# Altium PCB PCB_mezzanine_analog_template.PcbDoc (part 2 of 2)
Units mm, origin at the board's own origin, x right, y up, seen from the top; angles counter-clockwise.
Board outline 100.05 x 34.55 mm, 4 copper layers (Component Side, Ground Plane, Power Plane, Solder Side), stack 1.013 mm thick; 137 components, 101 nets, 470 pads, 426 vias.
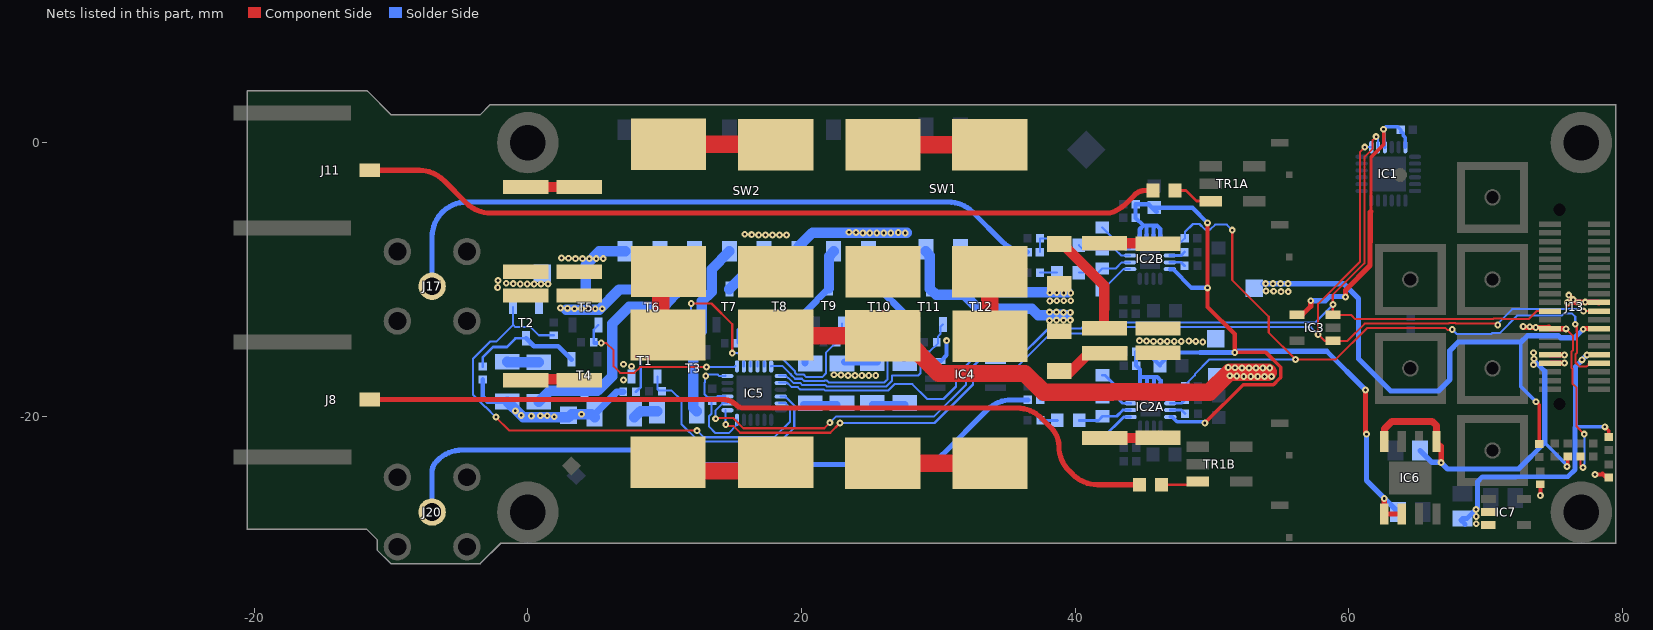
[diagram p4: the nets of this part, all layers, seen from the top]

## Via types
v1: diameter 0.5, hole 0.2, Component Side to Solder Side, tented both sides, 307 vias
v2: diameter 0.6, hole 0.3, Component Side to Solder Side, tented both sides, 114 vias
v3: diameter 0.5, hole 0.2, Component Side to Solder Side, 5 vias

## Nets (pads, with @x,y where several pads share a name; then routed paths per layer and width w, separated by ;. In a path a pad name is that pad's centre, name@x,y a point inside that pad or via, vN(x,y) a via of type N, cw(c..) or ccw(c..) an arc to the next point about the centre after c; other vN are vias at no path point) (continued)
N6V0A: C26.2 IC7.2 IC7.3 J13.31 R7.2 R36.1 R38.1 R46.2 R47.2 TP4.1 | length 36
  Component Side w0.254: v1(78.713,-20.772) 79,-21.059 R7.2@79,-21.53
  Solder Side w0.254: 76.579,-20.772 v1(78.713,-20.772)
  Solder Side w0.356: R47.2@-3.304,-17.305 -3.304,-18.562 -2.946,-18.92 R38.1@-1.501,-18.92 ; C26.2@68.181,-27.581 C26.2@68.5,-27.9 ; C26.2@68.299,-27.463 68.643,-27.463 v1(69.289,-26.817) 69.416,-26.69 69.416,-24.769 69.756,-24.43 72.2,-24.43 72.21,-24.42 76.012,-24.42 76.532,-23.9 76.532,-20.819 76.579,-20.772 76.579,-16.36 77.051,-15.888 v1(77.051,-15.875) ; v1@77.076,-15.849 v1(77.406,-15.519)
  Solder Side w0.508: R36.1@4.873,-19.858 6.524,-18.207 R46.2@6.97,-18.207
  Solder Side w0.762: R38.1@-1.501,-18.92 v1(-0.487,-19.934) -0.334,-20.086 2.97,-20.086 3.198,-19.858 v1(3.91,-19.858) 4.644,-19.858 R36.1@4.873,-20.086
  other v1: 69.315,-27.859 69.315,-27.325 1.928,-20.035 0.252,-19.985 0.912,-19.959 1.42,-19.959 -0.916,-19.604
N12V0A: J13.25 R8.2 R24.1 R26.1 TP2.1 | length 44.1
  Component Side w0.254: v1(73.683,-18.943) 73.912,-19.172 R8.2@73.912,-22.029
  Component Side w0.381: v1(77.138,-13.635) 77.185,-13.587 J13.25@78.3,-13.587
  Solder Side w0.254: 72.566,-14.574 72.566,-17.826 v1(73.683,-18.943)
  Solder Side w0.381: v1@53.719,-10.307 v1(53.922,-10.307) v1(54.456,-10.307) v1(55.014,-10.307) v1(55.548,-10.307) 59.622,-10.307 60.704,-11.39 60.704,-15.794 63.066,-18.156 66.546,-18.156 67.384,-17.318 67.384,-15.184 67.994,-14.574 72.566,-14.574 72.591,-14.574 73.057,-14.108 75.326,-14.108 75.482,-14.265 76.508,-14.265 v1(77.138,-13.635)
  Solder Side w0.508: R26.1@23.125,-16.046 R24.1@25.538,-16.046
  other v1: 23.391,-17.013 23.899,-17.013 24.407,-17.013 24.915,-17.013 25.423,-17.013 22.883,-16.987 22.375,-16.962 55.04,-10.891 55.573,-10.891 54.506,-10.866 53.948,-10.841
NetC5A_1: C5A.1 R10A.1 R13A.2 | length 2.4
  Solder Side w0.203: C5A.1@37.45,-18.8 37.47,-18.78 R13A.2@37.47,-17.8 38.2,-17.8 R10A.1@38.7,-18.3
NetC5B_1: C5B.1 R10B.1 R13B.2 | length 2.4
  Solder Side w0.152: C5B.1@37.42,-8 37.44,-7.98 R13B.2@37.44,-7 38.17,-7 R10B.1@38.67,-7.5
NetC13A_2: C13A.2 TR1A.1 | length 2.9
  Component Side w0.203: C13A.2@47.3,-3.5 48.106,-3.5 48.876,-4.27 TR1A.1@49.91,-4.27
NetC13B_2: C13B.2 TR1B.1 | length 2.8
  Component Side w0.203: C13B.2@46.3,-25 48.73,-25 TR1B.1@48.96,-24.77
NetIC2A_1: IC2A.1 R15A.2 | length 2.7
  Solder Side w0.203: R15A.2@42,-21.6 43.55,-20.05 IC2A.1@44.05,-20.05
NetIC2A_2: IC2A.2 R12A.2 R15A.1 | length 4.1
  Solder Side w0.203: R12A.2@40.3,-20.3 41.7,-20.3 R15A.1@42,-20 43.036,-20 43.486,-19.55 IC2A.2@44.05,-19.55
NetIC2A_3: IC2A.3 R9A.1 R10A.2 | length 4.1
  Solder Side w0.203: R10A.2@40.3,-18.3 41.7,-18.3 R9A.1@42,-18.6 43.013,-18.6 43.463,-19.05 IC2A.3@44.05,-19.05
NetIC2A_4: IC2A.4 R9A.2 | length 2.7
  Solder Side w0.203: R9A.2@42,-17 42.175,-17 43.725,-18.55 IC2A.4@44.05,-18.55
NetIC2A_10: IC2A.10 R11A.2 | length 1.2
  Solder Side w0.203: IC2A.10@46.95,-19.05 47.78,-19.05 R11A.2@48.03,-18.8
NetIC2A_11: IC2A.11 R14A.2 | length 1.2
  Solder Side w0.203: IC2A.11@46.95,-19.55 47.78,-19.55 R14A.2@48.03,-19.8
NetIC2B_1: IC2B.1 R15B.2 | length 2.7
  Solder Side w0.152: R15B.2@41.97,-10.8 43.52,-9.25 IC2B.1@44.02,-9.25
NetIC2B_2: IC2B.2 R12B.2 R15B.1 | length 4.1
  Solder Side w0.152: R12B.2@40.27,-9.5 41.67,-9.5 R15B.1@41.97,-9.2 42.964,-9.2 43.414,-8.75 IC2B.2@44.02,-8.75
NetIC2B_3: IC2B.3 R9B.1 R10B.2 | length 4.1
  Solder Side w0.152: R10B.2@40.27,-7.5 40.57,-7.8 R9B.1@41.97,-7.8 42.906,-7.8 43.356,-8.25 IC2B.3@44.02,-8.25
NetIC2B_4: IC2B.4 R9B.2 | length 2.7
  Solder Side w0.152: R9B.2@41.97,-6.2 43.52,-7.75 IC2B.4@44.02,-7.75
NetIC2B_10: IC2B.10 R11B.2 | length 1.2
  Solder Side w0.203: IC2B.10@46.92,-8.25 47.75,-8.25 R11B.2@48,-8
NetIC2B_11: IC2B.11 R14B.2 | length 1.2
  Solder Side w0.203: IC2B.11@46.92,-8.75 47.75,-8.75 R14B.2@48,-9
NetR12A_1: R12A.1 R16A.2 | length 1.2
  Solder Side w0.203: R16A.2@37.47,-20.3 R12A.1@38.7,-20.3
NetR12B_1: R12B.1 R16B.2 | length 1.2
  Solder Side w0.152: R16B.2@37.44,-9.5 R12B.1@38.67,-9.5
NetR18_2: R18.2 R19.1 | length 3.9
  Component Side w0.762: R19.1@42.137,-7.36 46.023,-7.36 R18.2@46.048,-7.385
NetR19_2: R19.2 R20.1 | length 7.7
  Component Side w0.762: R20.1@38.835,-7.409 39.086,-7.409 42.137,-10.46 42.137,-12.146 42.107,-12.176 42.107,-13.53 R19.2@42.137,-13.56
NetR20_2: R20.2 SW1.1 T12.3 | length 9.8
  Solder Side w0.762: SW1.1@31.621,-7.95 33.145,-9.474 T12.3@33.145,-10.709 33.378,-10.942 v1@39.444,-10.942
  other v1: 38.149,-11.577 38.657,-11.552 39.165,-11.552 39.673,-11.552 39.165,-10.993 39.673,-10.993 38.149,-10.968 38.657,-10.968
NetR21_2: R21.2 R22.1 | length 3.9
  Component Side w0.762: R22.1@42.162,-21.587 46.023,-21.587 R21.2@46.048,-21.562
NetR22_2: R22.2 R23.1 | length 3.9
  Component Side w0.762: R23.1@38.86,-16.888 39.493,-16.888 40.994,-15.387 R22.2@42.162,-15.387
NetR23_2: R23.2 SW1.2 T11.3 | length 13.8
  Solder Side w0.762: SW1.2@29.081,-7.95 29.386,-8.255 T11.3@29.386,-10.684 29.833,-11.13 31.911,-11.13 32.916,-12.136 36.828,-12.136 37.311,-12.619 39.368,-12.619 ; v1@38.758,-12.593 38.962,-12.593
  other v1: 38.123,-13 38.631,-12.974 39.139,-12.974 39.647,-12.974 39.139,-12.415 39.647,-12.415 38.123,-12.39 38.631,-12.39
NetR24_2: R24.2 R25.1 | length 2.4
  Solder Side w0.508: R24.2@25.169,-19.149 R25.1@27.557,-19.149
NetR25_2: R25.2 SW2.1 T10.3 | length 8.9
  Solder Side w0.508: T10.3@25.703,-10.684 27.506,-12.487 R25.2@27.506,-15.766
  Solder Side w0.762: SW2.1@24.89,-7.95 25.703,-8.763 T10.3@25.703,-10.684
NetR26_2: R26.2 R27.1 | length 2.4
  Solder Side w0.508: R27.1@20.153,-19.148 R26.2@22.591,-19.148
NetR27_2: R27.2 SW2.2 T9.3 | length 9
  Solder Side w0.508: R27.2@20.242,-16.096 20.242,-12.407 T9.3@22.009,-10.64
  Solder Side w0.762: T9.3@22.009,-10.64 22.009,-8.291 SW2.2@22.35,-7.95
NetR28_2: R28.2 R29.1 | length 7.9
  Component Side w1.27: R28.2@25.931,-23.426 33.765,-23.426 R29.1@33.78,-23.441
NetR29_2: R29.2 R30.1 | length 4.7
  Component Side w1.27: R30.1@33.755,-9.445 33.755,-14.115 R29.2@33.78,-14.141
NetR30_2: R30.2 R31.1 | length 7.8
  Component Side w1.27: R31.1@25.957,-0.145 R30.2@33.755,-0.145
NetR31_2: R31.2 SW2.3 T8.3 | length 11.9
  Solder Side w0.762: T8.3@18.413,-10.658 19.81,-9.261 SW2.3@19.81,-7.95 19.81,-7.589 20.801,-6.599 v1(24.484,-6.599) v1(24.992,-6.599) v1(25.5,-6.599) v1(26.008,-6.599) v1(26.516,-6.599) v1(27.582,-6.599) v1@27.684,-6.599
  other v1: 23.976,-6.573 27.074,-6.573 23.468,-6.548
NetR32_2: R32.2 R33.1 | length 8.4
  Component Side w1.27: R33.1@10.234,-23.366 10.871,-24.003 17.47,-24.003 R32.2@18.108,-23.365
NetR33_2: R33.2 R34.1 | length 5.2
  Component Side w1.27: R33.2@10.234,-14.066 10.285,-14.016 10.285,-13.028 9.701,-12.444 9.701,-10.004 R34.1@10.285,-9.42
NetR34_2: R34.2 R35.1 | length 7.8
  Component Side w1.27: R34.2@10.285,-0.12 18.083,-0.12 R35.1@18.108,-0.145
NetR35_2: R35.2 SW2.4 T7.3 | length 3.8
  Solder Side w0.762: T7.3@14.73,-10.709 17.115,-8.324 ccw(c16.741,-7.95) SW2.4@17.27,-7.95
  other v1: 16.864,-6.751 17.372,-6.751 17.88,-6.751 18.388,-6.751 18.896,-6.751 16.356,-6.726 15.848,-6.7
NetR36_2: R36.2 R37.1 | length 1.9
  Solder Side w0.762: R36.2@7.773,-20.086 8.23,-19.629 R37.1@9.445,-19.629
NetR37_2: R37.2 SW2.5 T3.3 | length 12.9
  Solder Side w0.762: R37.2@12.345,-19.629 12.088,-19.373 T3.3@12.088,-17.629 12.088,-14.422 12.719,-13.791 12.719,-11.607 13.435,-10.891 13.435,-9.245 SW2.5@14.73,-7.95
NetR38_2: R38.2 R39.1 | length 2.3
  Solder Side w0.762: R38.2@-1.501,-16.02 -1.475,-16.045 R39.1@0.785,-16.045
NetR39_2: R39.2 SW2.6 T4.3 | length 19.3
  Solder Side w0.762: R39.2@0.785,-18.945 1.586,-18.144 T4.3@4.128,-18.144 5.088,-18.144 6.17,-17.062 6.17,-13.228 7.415,-11.984 9.929,-11.984 10.492,-11.421 10.492,-11.38 11.027,-10.845 11.068,-10.845 12.19,-9.723 SW2.6@12.19,-7.95
NetR40_2: R40.2 R41.1 | length 4
  Component Side w0.762: R40.2@-0.104,-17.292 3.705,-17.292 R41.1@3.808,-17.395
NetR41_2: R41.2 SW2.7 T6.3 | length 9.9
  Solder Side w0.762: v1@2.789,-12.214 4.418,-12.214 5.203,-12.214 6.683,-10.734 T6.3@9.091,-10.734 9.65,-10.176 SW2.7@9.65,-7.95
  other v1: 3.402,-12.136 3.91,-12.136 4.418,-12.136 4.926,-12.136 5.434,-12.136 2.894,-12.111 2.386,-12.085
NetR42_2: R42.2 R43.1 | length 3.9
  Component Side w0.762: R42.2@-0.154,-3.245 R43.1@3.757,-3.245
NetR43_2: R43.2 SW2.8 T5.3 | length 5.1
  Solder Side w0.762: T5.3@4.214,-10.714 4.214,-8.961 5.225,-7.95 SW2.8@7.11,-7.95
  other v1: 3.478,-8.478 3.986,-8.478 4.494,-8.478 5.002,-8.478 5.51,-8.478 2.97,-8.453 2.462,-8.428
NetR46_1: R46.1 T1.3 T3.1 | length 6.5
  Solder Side w0.203: R46.1@7.91,-18.207 8.253,-17.864 8.253,-15.075 T1.3@8.532,-14.796
  Solder Side w0.508: T1.3@8.532,-14.796 9.066,-15.329 T3.1@11.138,-15.329
NetR47_1: R47.1 T2.3 T4.1 | length 8.4
  Solder Side w0.203: R47.1@-3.304,-16.365 -3.304,-15.692 -2.542,-14.93 -1.526,-14.93 -0.898,-14.302 T2.3@-0.129,-14.302
  Solder Side w0.356: T2.3@-0.129,-14.302 0.448,-14.879 2.213,-14.879 T4.1@3.178,-15.844
P3V3: C10.2 C12.2 IC1.21 IC1.24 IC3.4 IC4.8 IC5.18 IC5.21 IC5.24 J13.19 R5.1 R6.1 R40.1 R42.1 T1.2 T2.2 TP5.1 | length 38.7
  Component Side w0.254: 61.622,-5.033 61.622,-1.055 62.537,-0.141 v1(62.537,0.974)
  Component Side w0.305: v1(74,-25.788) R6.1@74,-24.97 ; v1(78.001,-24.252) 78.484,-24.252 78.535,-24.201 78.804,-24.47 R5.1@79,-24.47
  Component Side w0.381: IC3.4@56.229,-12.583 56.599,-12.583 57.224,-11.958 v1(57.224,-11.552) ; v3(59.753,-11.277) 59.753,-10.794 61.557,-8.99 61.557,-7.261 61.574,-7.244 61.574,-5.082 61.622,-5.033 ; v1(75.984,-11.684) 75.984,-11.834 76.16,-11.658 v1(77.279,-11.658) 78.215,-11.658 78.27,-11.713 J13.19@78.3,-11.682 ; v1@76.312,-11.356 76.66,-11.704 v1(76.833,-11.704)
  Solder Side w0.152: C12.2@13.511,-18.885 13.863,-18.533 IC5.21@14.456,-18.533 ; IC5.24@14.456,-17.033 14.426,-17.064 13.984,-17.064 13.861,-16.941 13.126,-16.941 v1(13.003,-17.064) 12.977,-17.064 12.952,-17.089 12.952,-17.495 12.921,-17.526 12.921,-18.408 13.393,-18.879 C12.2@13.46,-18.879 13.419,-18.92 13.419,-19.806 13.246,-19.979 13.246,-20.761 13.714,-21.229 14.67,-21.229 15.278,-20.622 IC5.18@15.278,-20.245
  Solder Side w0.254: IC1.21@62.638,-0.331 62.584,-0.276 62.584,0.273 62.537,0.319 v1(62.537,0.974) 62.711,1.148 63.581,1.148 C10.2@63.785,0.945 ; C10.2@63.785,0.767 63.904,0.767 63.994,0.678 63.994,0.519 64.138,0.374 IC1.24@64.138,-0.331
  Solder Side w0.305: IC4.8@29.777,-15.962 30.183,-15.962 30.605,-15.54 v1(30.605,-14.473)
  Solder Side w0.381: v1(57.224,-11.552) 58.291,-11.552 58.604,-11.238 59.714,-11.238 v3(59.753,-11.277)
  other v1: 6.996,-17.353 7.567,-16.352 6.983,-16.2 76.401,-11.476 76.071,-11.145 -2.212,-10.587 -0.561,-10.333 -0.053,-10.333 0.455,-10.333 0.963,-10.333 1.471,-10.333 -1.069,-10.307 -1.577,-10.282 -2.186,-10.079
P5V0A: C1A.2 C1B.2 C2A.2 C2B.2 C3A.2 C3B.2 C25.2 IC2A.5 IC2A.6 IC2A.7 IC2A.8 IC2A.12 IC2B.5 IC2B.6 IC2B.7 IC2B.8 IC2B.12 IC6.1 IC6.2 | length 78.3
  Component Side w0.254: v1(49.477,-20.493) 52.271,-17.699 54.493,-17.699 54.883,-17.308 54.883,-17.294 55.014,-17.163 55.014,-16.404 53.947,-15.336 v1(51.662,-15.336)
  Component Side w0.305: v1(49.68,-5.862) v1(49.68,-10.612) 49.68,-12.009 51.662,-13.99 v1(51.662,-15.336)
  Component Side w0.381: v1(61.212,-18.08) 61.212,-21.229 v1(61.288,-21.305) ; v1(62.595,-26.016) IC6.1@62.595,-27.15 IC6.2@63.865,-27.15
  Solder Side w0.254: IC2A.12@46.95,-20.05 47.104,-20.05 47.444,-20.389 49.376,-20.389 v1(49.477,-20.493) v1(49.477,-20.493)
  Solder Side w0.305: IC2B.5@44.72,-7.05 44.72,-6.331 44.985,-6.065 ; IC2A.5@44.75,-17.85 44.727,-17.827 44.727,-17.14 ; IC2B.6@45.22,-7.05 45.22,-6.106 45.261,-6.065 ; IC2A.6@45.25,-17.85 45.25,-17.154 45.235,-17.14 ; IC2B.7@45.72,-7.05 45.72,-6.245 45.9,-6.065 ; IC2A.7@45.75,-17.85 45.75,-17.159 45.769,-17.14 ; C2B.2@45.769,-4.757 48.575,-4.757 v1(49.68,-5.862) ; C2B.2@45.959,-5.049 45.921,-5.049 45.372,-4.5 C1B.2@44.42,-4.5 C3B.2@44.42,-5.5 44.985,-6.065 ; IC2B.8@46.22,-7.05 46.22,-6.313 45.972,-6.065 45.9,-6.065 ; IC2A.8@46.25,-17.85 46.25,-17.392 45.997,-17.14 45.769,-17.14 ; IC2B.12@46.92,-9.25 47.15,-9.25 48.512,-10.612 v1(49.68,-10.612) ; 49.147,-15.336 47.09,-15.336 46.2,-16.226 C2A.2@46.2,-16.3 45.2,-15.3 C1A.2@44.45,-15.3 C3A.2@44.45,-16.3 44.727,-16.577 44.727,-17.14 ; 44.727,-17.14 45.235,-17.14 ; 44.985,-6.065 45.261,-6.065 ; 45.235,-17.14 45.769,-17.14 ; 45.261,-6.065 45.9,-6.065
  Solder Side w0.381: 49.147,-15.336 v1(51.662,-15.336) 51.747,-15.251 58.384,-15.251 v1(61.212,-18.08) ; v1(61.288,-21.305) 61.288,-24.688 v1@62.569,-25.969 ; v1@62.558,-25.979 v1(62.595,-26.016) ; v1@62.605,-26.005 C25.2@63.6,-27
P6V0A: C11.2 IC6.5 IC6.8 J13.32 J13.34 R2.2 R28.1 R32.1 TP3.1 | length 68.3
  Component Side w0.254: v1(75.944,-23.668) 75.868,-23.668 75.995,-23.541 R2.2@75.995,-22.944
  Component Side w0.381: IC6.5@66.405,-21.85 66.749,-22.194 v3(66.749,-23.388) ; J13.32@74.7,-15.492 74.722,-15.514 v1(75.766,-15.514) ; J13.34@74.823,-16.098 v1(75.766,-16.098)
  Component Side w0.508: IC6.8@62.595,-21.85 62.595,-20.913 63.142,-20.366 65.2,-20.366 ; 65.211,-20.366 66.089,-20.366 66.405,-20.682 IC6.5@66.405,-21.85
  Component Side w1.27: R32.1@18.108,-14.065 18.169,-14.126 R28.1@25.931,-14.126 27.291,-14.126 30.039,-16.874 36.324,-16.874 37.7,-18.25 42.695,-18.25 42.735,-18.211 45.462,-18.211 45.501,-18.25 49.815,-18.25 51.281,-16.784 54.1,-16.784
  Solder Side w0.254: 74.318,-21.941 75.944,-23.566 v1(75.944,-23.668)
  Solder Side w0.381: C11.2@65.211,-22.499 66.079,-23.367 66.728,-23.367 v3(66.749,-23.388) 67.206,-23.845 72.414,-23.845 74.318,-21.941 74.318,-16.708 v1@73.586,-15.975
  other v1: 52.322,-17.089 52.83,-17.089 53.338,-17.089 53.846,-17.089 54.354,-17.089 51.814,-17.064 51.306,-17.038 52.195,-16.479 52.703,-16.479 53.211,-16.479 53.719,-16.479 54.227,-16.479 51.687,-16.454 51.179,-16.429 73.506,-16.225 73.531,-15.794 73.506,-15.362
P12V0A: J13.26 R1.2 R18.1 R21.1 TP1.1 | length 14.9
  Component Side w0.152: v1(75.868,-13.609) 76.372,-14.113 76.372,-15.192 76.267,-15.296 76.267,-16.453 76.346,-16.532 76.346,-17.619 76.655,-17.928 76.655,-20.746 v1(77.214,-21.305) ; R1.2@76.935,-22.944 76.935,-23.566 v1(77.112,-23.744)
  Component Side w0.381: v1(72.744,-13.431) 72.82,-13.508 v1(73.658,-13.508) 74.596,-13.508 74.608,-13.495 J13.26@74.7,-13.587 74.722,-13.609 v1(75.868,-13.609)
  Solder Side w0.152: v1(77.112,-23.744) 77.112,-23.591 77.214,-23.49 v1(77.214,-21.305)
  other v1: 49.325,-14.574 45.718,-14.524 46.226,-14.524 46.734,-14.524 47.242,-14.524 47.75,-14.524 48.817,-14.524 45.21,-14.498 48.309,-14.498 44.702,-14.473 73.226,-13.457
RF1_IN: C5B.2 J17.1 | length 49.9
  Solder Side w0.381: J17.1@-7,-10.5 -7,-6.878 cw(c-4.46,-6.878) -4.46,-4.338 30.721,-4.338 cw(c30.721,-6.878) 32.517,-5.082 34.691,-7.256 ccw(c36.487,-5.46) 36.487,-8 C5B.2@36.52,-8
RF1_OUT: C13B.1 J8.1 | length 59.4
  Component Side w0.381: J8.1@-11.55,-18.776 14.245,-18.776 cw(c14.245,-20.215) 15.263,-19.197 ccw(c15.754,-18.707) 15.754,-19.4 35.751,-19.4 cw(c35.751,-21.94) 37.547,-20.144 38.252,-20.85 cw(c36.908,-22.194) 38.809,-22.194 ccw(c41.323,-22.194) 39.546,-23.972 39.829,-24.256 ccw(c41.626,-22.46) 41.626,-25 C13B.1@44.7,-25
RF2_IN: C5A.2 J20.1 | length 49.3
  Solder Side w0.381: J20.1@-7,-27 -7,-24.054 cw(c-5.932,-24.054) -6.687,-23.299 -6.606,-23.218 cw(c-4.81,-25.014) -4.81,-22.474 8.678,-22.474 cw(c8.678,-24.874) 10.376,-23.177 ccw(c11.192,-22.36) 11.192,-23.515 28.537,-23.515 ccw(c28.537,-20.975) 30.333,-22.771 33.56,-19.544 cw(c35.356,-21.34) 33.577,-19.527 cw(c35.356,-21.34) 35.356,-18.8 C5A.2@36.55,-18.8
RF2_OUT: C13A.1 J11.1 | length 58.9
  Component Side w0.381: J11.1@-11.575,-2.025 -7.939,-2.025 cw(c-7.939,-4.565) -6.143,-2.769 -4.505,-4.407 ccw(c-2.709,-2.611) -2.709,-5.151 42.383,-5.151 ccw(c42.383,-4.102) 42.918,-5.004 43.27,-4.795 ccw(c41.974,-2.611) 43.77,-4.407 44.397,-3.779 cw(c45.072,-4.454) 45.072,-3.5 C13A.1@45.7,-3.5
SCL: IC1.19 IC3.1 IC4.2 IC5.19 J13.21 | length 85.8
  Component Side w0.152: v1(14.456,-20.6) 14.556,-20.7 15.004,-20.7 15.508,-21.204 22.096,-21.204 v1(22.807,-20.493) ; v1(61.167,-0.331) 60.829,-0.669 60.829,-7.416 60.833,-7.421 60.833,-8.69 57.758,-11.766 v1(57.758,-14.016) 58.225,-14.483 IC3.1@58.829,-14.483 59.906,-14.483 61.161,-13.228 67.317,-13.228 67.364,-13.181 67.76,-13.181 67.807,-13.228 v1@70.889,-13.228 ; v1(77.146,-12.317) J13.21@78.3,-12.317
  Solder Side w0.152: v1(14.456,-20.6) IC5.19@14.456,-19.533 ; v1(22.807,-20.493) 29.716,-20.493 32.535,-17.673 32.535,-17.165 33.089,-16.612 IC4.2@34.177,-16.612 35.542,-16.612 38.189,-13.965 40.587,-13.965 41.07,-13.482 57.224,-13.482 v1(57.758,-14.016) ; v1(61.167,-0.331) IC1.19@61.638,-0.331 ; v1(70.889,-13.33) 70.889,-13.228 71.949,-12.169 76.621,-12.169 76.635,-12.183 77.011,-12.183 v1(77.146,-12.317)
SDA: IC1.20 IC3.3 IC4.1 IC5.20 J13.22 | length 82.8
  Component Side w0.152: v1(13.724,-20.178) 13.78,-20.121 14.994,-20.121 15.746,-20.874 21.664,-20.874 v1(22.071,-20.467) ; v1(61.999,0.437) 61.741,0.179 61.741,-0.433 61.154,-1.02 61.154,-6.718 61.133,-6.739 61.133,-7.29 61.138,-7.294 61.138,-8.817 58.829,-11.125 IC3.3@58.829,-12.583 60.16,-12.583 60.475,-12.898 67.216,-12.898 67.238,-12.877 67.886,-12.877 67.908,-12.898 70.543,-12.898 70.59,-12.851 71.189,-12.851 71.236,-12.898 73.134,-12.898 73.714,-12.317 J13.22@74.7,-12.317
  Solder Side w0.152: v1(13.724,-20.178) 13.724,-19.563 14.242,-19.045 IC5.20@14.578,-19.045 ; v1(22.071,-20.467) 22.528,-20.01 29.691,-20.01 32.027,-17.673 32.027,-16.869 32.934,-15.962 IC4.1@34.177,-15.962 35.669,-15.962 38.047,-13.584 40.46,-13.584 40.892,-13.152 57.529,-13.152 v1(58.85,-11.831) ; v1(61.999,0.437) 62.138,0.298 IC1.20@62.138,-0.331
SW1: IC5.1 R48.1 T5.1 | length 13.6
  Component Side w0.152: v1(5.357,-14.651) 5.738,-14.651 6.272,-15.184 6.272,-16.352 6.75,-16.831 7.774,-16.831 8.202,-16.403 v1(13.054,-16.403)
  Solder Side w0.152: R48.1@4.811,-14.6 R48.1@4.862,-14.651 ; R48.1@4.811,-14.6 4.812,-13.666 T5.1@5.164,-13.314 ; v1(13.054,-16.403) 15.086,-16.403 IC5.1@15.156,-16.333
  Solder Side w0.305: R48.1@4.862,-14.651 v1(5.357,-14.651)
SW2: IC5.2 R49.1 T6.1 | length 10.6
  Component Side w0.152: v1(11.936,-11.755) 13.422,-11.755 14.933,-13.266 v1(14.933,-15.387)
  Solder Side w0.152: T6.1@10.041,-13.334 11.166,-13.334 R49.1@11.301,-13.47 11.364,-13.47 11.936,-12.898 v1(11.936,-11.755) ; v1(14.933,-15.387) 15.34,-15.387 15.778,-15.825 IC5.2@15.778,-16.345
SW3: IC5.3 R50.1 T7.1 | length 3.6
  Solder Side w0.152: T7.1@15.68,-13.309 15.327,-13.662 R50.1@15.327,-14.651 16.278,-15.601 IC5.3@16.278,-16.345
SW4: IC5.4 R51.1 T8.1 | length 4.9
  Solder Side w0.152: IC5.4@16.778,-16.345 16.778,-15.779 17.22,-15.336 18.273,-15.336 18.87,-14.739 19.086,-14.739 R51.1@19.086,-14.524 19.086,-13.535 T8.1@19.363,-13.258
SW5: IC5.5 R52.1 T9.1 | length 9.9
  Solder Side w0.152: IC5.5@17.278,-16.345 17.278,-15.989 17.626,-15.641 18.464,-15.641 19.52,-16.697 19.52,-16.817 19.654,-16.951 20.15,-16.951 20.314,-17.114 21.537,-17.114 21.777,-16.875 21.777,-15.368 22.959,-14.186 T9.1@22.959,-13.24
SW6: IC5.6 R53.1 T10.1 | length 13.4
  Solder Side w0.152: IC5.6@17.778,-16.345 17.79,-16.333 18.622,-16.333 19.215,-16.926 19.215,-16.943 19.527,-17.255 20.024,-17.255 20.188,-17.419 21.663,-17.419 21.696,-17.387 21.855,-17.387 21.989,-17.521 26.064,-17.521 26.198,-17.387 26.198,-17.381 26.298,-17.281 26.298,-14.6 R53.1@26.249,-14.6 26.653,-14.196 T10.1@26.653,-13.284
SW7: IC5.7 R54.1 T11.1 | length 15.8
  Solder Side w0.152: IC5.7@18.356,-17.033 18.839,-17.033 18.855,-17.017 18.859,-17.017 18.859,-17.044 19.006,-17.191 19.031,-17.191 19.401,-17.56 19.898,-17.56 20.062,-17.724 21.761,-17.724 21.862,-17.826 26.19,-17.826 26.503,-17.513 26.503,-17.507 26.603,-17.407 26.603,-17.017 28.544,-17.017 28.686,-16.875 28.686,-15.605 29.005,-15.286 29.348,-15.286 29.983,-14.651 29.983,-14.155 30.148,-13.99 30.148,-13.472 T11.1@30.336,-13.284
SW8: IC5.8 R55.1 T12.1 | length 19.3
  Solder Side w0.152: IC5.8@18.356,-17.533 IC5.8@18.478,-17.533 ; IC5.8@18.478,-17.545 18.92,-17.545 18.997,-17.622 19.031,-17.622 19.275,-17.865 19.726,-17.865 19.89,-18.029 21.635,-18.029 21.736,-18.13 26.317,-18.13 26.799,-17.648 28.09,-17.648 29.183,-18.74 30.376,-18.74 31.291,-17.826 31.291,-17.051 R55.1@33.666,-14.676 33.666,-14.028 T12.1@33.856,-13.838
SW9: IC5.10 R44.1 T1.1 | length 16.8
  Solder Side w0.152: T1.1@9.482,-17.096 9.482,-18.026 9.561,-18.105 10.488,-18.105 11.225,-18.842 11.225,-20.585 12.478,-21.839 18.464,-21.839 19.469,-20.834 19.469,-19.208 18.819,-18.558 IC5.10@18.483,-18.558
SW10: IC5.11 R45.1 T2.1 | length 38.1
  Component Side w0.152: v1(-2.339,-20.061) -1.348,-21.051 v1(12.368,-21.051)
  Solder Side w0.152: v1(-2.339,-20.061) -3.073,-19.326 -3.115,-19.326 -4.015,-18.426 -4.015,-15.794 -2.771,-14.549 -2.313,-14.549 -1.079,-13.315 ; T2.1@-1.079,-12.002 -1.079,-13.315 ; R45.1@1.903,-14.079 0.798,-14.079 0.201,-13.482 -0.911,-13.482 -1.079,-13.315 ; v1(12.368,-21.051) 12.85,-21.534 18.007,-21.534 19.162,-20.379 19.162,-19.401 18.982,-19.221 18.982,-19.207 18.807,-19.033 IC5.11@18.356,-19.033
VCM: C6A.2 C6B.2 IC2A.9 IC2B.9 J13.33 | length 55.5
  Component Side w0.152: v1(51.484,-6.396) 51.484,-10.053 54.151,-12.72 54.151,-13.889 v1(56.107,-15.844) 59.053,-15.844 61.364,-13.533 67.056,-13.533 67.209,-13.685 67.537,-13.685 v1(67.562,-13.66) ; v1(76.554,-13.279) 76.659,-13.385 76.659,-13.833 76.681,-13.854 76.681,-15.349 76.572,-15.457 76.572,-16.073 76.853,-16.353 77.386,-16.353 77.405,-16.334 77.427,-16.334 77.54,-16.22 77.54,-16.127 J13.33@78.3,-16.127
  Solder Side w0.152: IC2B.9@46.92,-7.75 47.27,-7.75 C6B.2@48.02,-7 48.02,-6.532 48.61,-5.942 49.084,-5.942 49.482,-6.341 49.879,-6.341 50.23,-5.989 51.077,-5.989 v1(51.484,-6.396) ; IC2A.9@46.95,-18.55 47.196,-18.55 48.745,-17.001 48.745,-16.916 49.816,-15.844 v1(56.107,-15.844) ; v1(67.562,-13.66) 67.892,-13.99 70.41,-13.99 70.5,-13.9 71.056,-13.9 72.334,-12.622 75.594,-12.622 75.742,-12.474 76.307,-12.474 76.554,-12.72 v1(76.554,-13.279)
pads on no net: FTG1.FTG2 FTG2.1 FTG3.1 FTG4.1 IC1.22 IC1.25 IC3.5 IC4.3 IC5.12 IC5.13 IC5.14 IC5.15 IC5.16 IC5.17 IC5.22 IC5.25 IC6.4 IC6.7 IC7.4 J13.20 J13.27 J13.28 J13.P1 J13.P2 TR1A.2 TR1B.2

## Polygon pours and split planes (outlines as drawn)
GND on Component Side "gnd" (solid, remove dead copper, pour order 2): -20.015,3.265 -11.937,3.265 -10.273,1.601 -10.249,1.625 -3.472,1.625 -2.472,2.625 79.028,2.625 79.028,-29.011 -2.108,-29.011 -3.472,-30.375 -9.972,-30.375 -10.543,-29.804 -10.543,-28.826 -11.604,-27.765 -20.015,-27.765 -20.015,-22.836 -19.976,-22.875 -12.663,-22.875 -11.828,-22.04 -11.828,-21.276 -12.389,-20.714 -12.389,-16.701 -11.828,-16.14 -11.828,-15.327 -12.44,-14.715 -20.015,-14.715 -19.972,-5.875 -19.772,-5.875 -12.439,-5.875 -11.853,-5.29 -11.853,-4.546 -12.472,-3.927 -12.472,0.125 -11.972,0.625 -11.972,1.125 -12.472,1.625 -19.972,1.625 -19.972,3.125
GND on Solder Side "gnd" (solid, remove dead copper, pour order 0): -20.015,3.265 -11.937,3.265 -10.273,1.601 -10.249,1.625 -3.472,1.625 -2.472,2.625 79.028,2.625 79.028,-28.875 -1.972,-28.875 -3.472,-30.375 -9.972,-30.375 -10.543,-29.804 -10.543,-28.826 -11.604,-27.765 -20.015,-27.765 -20.015,-22.836 -19.976,-22.875 -12.663,-22.875 -11.828,-22.04 -11.828,-21.276 -12.389,-20.714 -12.389,-16.701 -11.828,-16.14 -11.828,-15.327 -12.44,-14.715 -20.015,-14.715 -19.972,-5.875 -19.772,-5.875 -12.439,-5.875 -11.853,-5.29 -11.853,-4.546 -12.472,-3.927 -12.472,0.125 -11.972,0.625 -11.972,1.125 -12.472,1.625 -19.972,1.625 -19.972,3.125
GND on Ground Plane (split plane): 217 vertices, not listed, extent -20.015,-30.265 79.015,3.265
P12V0A on Power Plane (split plane): 76.438,-13.255 76.438,-13.76 75.766,-14.432 75.385,-14.051 75.364,-14.037 75.339,-14.032 72.912,-14.032 71.94,-13.06 71.919,-13.046 71.895,-13.041 52.165,-13.041 52.14,-13.046 52.119,-13.06 49.762,-15.418 49.748,-15.439 49.743,-15.463 49.743,-16.718 49.742,-16.719 49.717,-16.735 49.706,-16.751 46.299,-16.751 46.291,-16.75 46.267,-16.75 46.263,-16.745 46.26,-16.735 46.244,-16.71 46.219,-16.693 46.208,-16.691 46.189,-16.679 46.164,-16.674 45.353,-16.674 44.559,-15.88 44.538,-15.866 44.513,-15.861 44.337,-15.861 43.776,-15.3 43.776,-13.179 45.13,-11.825 75.008,-11.825
P6V0A on Power Plane (split plane): 72.839,-14.143 72.86,-14.157 72.885,-14.162 75.313,-14.162 76.413,-15.262 76.413,-17.437 75.842,-18.008 73.882,-18.008 72.885,-17.012 72.885,-16.053 72.88,-16.023 72.871,-16.011 72.863,-15.999 71.288,-14.424 71.263,-14.407 71.234,-14.401 68.288,-14.401 68.259,-14.407 68.246,-14.415 68.234,-14.424 65.386,-17.272 55.029,-17.272 55,-17.277 54.975,-17.294 54.693,-17.576 50.666,-17.576 49.903,-16.813 49.899,-16.791 49.885,-16.77 49.872,-16.762 49.872,-15.49 52.191,-13.171 71.868,-13.171
N12V0A on Power Plane (split plane): 56.412,-10.425 56.412,-11.695 45.103,-11.695 45.079,-11.7 45.058,-11.714 43.666,-13.106 43.652,-13.127 43.647,-13.152 43.647,-15.277 32.448,-15.277 32.424,-15.282 32.403,-15.296 30.649,-17.05 28.374,-17.05 28.39,-17.033 28.404,-17.012 28.409,-16.987 28.404,-16.963 28.39,-16.942 28.369,-16.928 28.344,-16.923 28.32,-16.928 28.299,-16.942 27.454,-17.786 19.202,-17.786 18.148,-16.732 18.148,-15.804 18.151,-15.802 18.967,-14.986 30.975,-14.986 31.004,-14.98 31.029,-14.964 31.794,-14.199 32.779,-14.199 32.808,-14.193 32.833,-14.176 33.381,-13.628 40.449,-13.628 40.474,-13.623 40.495,-13.609 44.134,-9.971 55.958,-9.971
N6V0A on Power Plane (split plane): 77.926,-15.124 77.926,-21.258 72.892,-26.292 72.881,-26.294 72.873,-26.3 46.767,-26.3 44.361,-23.895 44.361,-17.78 44.355,-17.751 44.339,-17.726 43.653,-17.04 43.628,-17.023 43.599,-17.018 36.817,-17.018 36.788,-17.023 36.779,-17.029 32.607,-17.029 32.582,-17.034 32.561,-17.048 29.08,-20.529 -1.398,-20.529 -1.791,-20.136 -1.791,-18.411 -1.22,-17.84 17.002,-17.84 17.027,-17.835 17.048,-17.821 18.05,-16.818 19.129,-17.897 19.15,-17.911 19.175,-17.916 27.481,-17.916 27.506,-17.911 27.527,-17.897 28.244,-17.179 30.675,-17.179 30.7,-17.174 30.721,-17.16 32.475,-15.406 43.699,-15.406 44.264,-15.971 44.285,-15.985 44.31,-15.99 44.487,-15.99 45.28,-16.784 45.301,-16.798 45.326,-16.803 45.389,-16.803 45.399,-16.818 45.424,-16.834 45.453,-16.84 46.113,-16.84 46.113,-17.602 46.119,-17.631 46.136,-17.656 46.596,-18.116 46.596,-23.952 46.602,-23.981 46.618,-24.006 46.847,-24.235 46.859,-24.243 46.872,-24.251 46.901,-24.257 53.2,-24.257 53.229,-24.251 53.238,-24.245 71.742,-24.245 71.767,-24.24 71.788,-24.226 75.914,-20.101 75.928,-20.08 75.933,-20.055 75.933,-18.141 75.936,-18.139 76.546,-17.529 76.554,-17.517 76.563,-17.504 76.568,-17.475 76.568,-15.246 76.571,-15.243 76.588,-15.218 76.589,-15.215 76.86,-14.944 77.746,-14.944
GND on Power Plane (split plane): 72.733,-16.084 72.733,-17.043 72.738,-17.072 72.755,-17.097 73.796,-18.139 73.821,-18.155 73.85,-18.161 75.803,-18.161 75.803,-20.028 71.715,-24.116 53.238,-24.116 53.229,-24.11 53.2,-24.104 46.933,-24.104 46.749,-23.92 46.749,-18.085 46.743,-18.055 46.726,-18.031 46.266,-17.57 46.266,-16.879 46.286,-16.879 46.293,-16.881 49.755,-16.881 50.581,-17.707 50.606,-17.723 50.635,-17.729 54.724,-17.729 54.753,-17.723 54.778,-17.707 55.061,-17.424 65.418,-17.424 65.447,-17.419 65.472,-17.402 68.319,-14.554 71.203,-14.554
GND on Power Plane (split plane): -10.423,1.737 -12.259,-0.098 -12.275,-0.123 -12.281,-0.152 -12.281,-4.059 -12.302,-4.042 -12.377,-4.002 -12.39,-3.995 -12.415,-3.985 -12.415,-0.066 -12.39,-0.055 -12.302,-0.008 -12.224,0.055 -12.055,0.224 -11.992,0.301 -11.951,0.378 -11.945,0.39 -11.853,0.61 -11.824,0.706 -11.815,0.806 -11.815,1.044 -11.824,1.144 -11.853,1.24 -11.945,1.46 -11.951,1.472 -11.992,1.548 -12.055,1.626 -12.224,1.795 -12.28,1.84 -12.302,1.858 -12.377,1.898 -12.39,1.905 -12.61,1.997 -12.648,2.008 -12.706,2.026 -12.806,2.035 -20.015,2.035 -20.015,3.265 -11.951,3.265
GND on Power Plane (split plane): 74.942,-4.045 74.942,-11.695 56.542,-11.695 56.542,-10.398 56.537,-10.373 56.523,-10.352 56.03,-9.86 56.009,-9.846 55.985,-9.841 44.107,-9.841 44.082,-9.846 44.061,-9.86 40.423,-13.499 33.439,-13.499 33.439,-12.573 33.433,-12.544 33.417,-12.519 32.299,-11.401 32.274,-11.385 32.245,-11.379 6.521,-11.379 3.47,-8.328 3.445,-8.311 3.416,-8.305 -2.146,-8.305 -2.176,-8.311 -2.188,-8.319 -2.2,-8.328 -2.835,-8.963 -2.852,-8.988 -2.858,-9.017 -2.858,-13.1 -4.362,-14.605 -8.008,-14.605 -9.893,-12.719 -9.893,-4.73 -7.398,-2.235 73.133,-2.235
GND on Power Plane (split plane): -12.281,-14.859 -12.275,-14.888 -12.268,-14.9 -12.276,-14.892 -12.352,-14.852 -12.365,-14.845 -12.585,-14.754 -12.623,-14.742 -12.681,-14.725 -12.781,-14.715 -20.015,-14.715 -20.015,-6.086 -12.806,-6.086 -12.706,-6.076 -12.61,-6.047 -12.39,-5.955 -12.302,-5.908 -12.281,-5.891
P3V3 on Power Plane (split plane): 79.015,-28.765 73.368,-28.765 73.368,-26.746 73.362,-26.717 73.346,-26.692 73.01,-26.357 78.036,-21.331 78.05,-21.31 78.055,-21.285 78.055,-15.097 78.05,-15.072 78.036,-15.051 77.819,-14.833 77.798,-14.819 77.773,-14.814 76.833,-14.814 76.808,-14.819 76.787,-14.833 76.506,-15.115 76.488,-15.118 76.467,-15.133 75.858,-14.524 76.549,-13.833 76.563,-13.812 76.568,-13.787 76.568,-13.228 76.563,-13.203 76.549,-13.182 75.095,-11.729 75.095,-4.013 75.089,-3.984 75.083,-3.974 75.073,-3.959 73.219,-2.105 73.194,-2.088 73.165,-2.082 -7.43,-2.082 -7.459,-2.088 -7.484,-2.105 -10.024,-4.645 -10.04,-4.67 -10.046,-4.699 -10.046,-12.751 -10.04,-12.78 -10.024,-12.805 -8.093,-14.735 -8.081,-14.743 -8.068,-14.752 -8.039,-14.757 -4.331,-14.757 -4.302,-14.752 -4.277,-14.735 -2.727,-13.186 -2.719,-13.173 -2.711,-13.161 -2.705,-13.132 -2.705,-9.048 -2.115,-8.458 3.385,-8.458 6.436,-11.509 6.448,-11.518 6.46,-11.526 6.49,-11.532 32.214,-11.532 33.286,-12.604 33.286,-13.506 32.747,-14.046 31.763,-14.046 31.733,-14.052 31.721,-14.06 31.709,-14.068 30.944,-14.833 18.936,-14.833 18.906,-14.839 18.882,-14.856 18.046,-15.691 18.037,-15.697 18.023,-15.718 18.018,-15.743 18.018,-16.694 17.993,-16.699 17.972,-16.713 16.975,-17.71 -1.146,-17.71 -1.153,-17.7 -1.177,-17.684 -1.207,-17.678 -9.278,-17.678 -12.128,-14.827 -12.128,-5.749 -12.055,-5.676 -11.992,-5.599 -11.951,-5.522 -11.945,-5.51 -11.853,-5.29 -11.824,-5.194 -11.815,-5.094 -11.815,-4.856 -11.824,-4.756 -11.853,-4.66 -11.945,-4.44 -11.951,-4.428 -11.992,-4.352 -12.055,-4.274 -12.128,-4.201 -12.128,-0.184 -10.312,1.633 -10.273,1.601 -10.185,1.554 -10.089,1.525 -9.989,1.515 -3.511,1.515 -3.411,1.525 -3.315,1.554 -3.227,1.601 -3.15,1.664 -2.549,2.265 79.015,2.265
GND on Power Plane (split plane): -9.363,-17.808 -9.338,-17.825 -9.309,-17.831 -1.394,-17.831 -1.902,-18.339 -1.916,-18.36 -1.921,-18.384 -1.921,-20.162 -1.916,-20.187 -1.902,-20.208 -1.47,-20.64 -1.449,-20.654 -1.424,-20.659 29.106,-20.659 29.131,-20.654 29.152,-20.64 32.633,-17.159 36.779,-17.159 36.788,-17.165 36.817,-17.17 43.567,-17.17 44.208,-17.811 44.208,-23.927 44.214,-23.956 44.231,-23.981 46.669,-26.419 46.694,-26.436 46.723,-26.441 46.752,-26.436 46.761,-26.43 72.867,-26.43 73.215,-26.778 73.215,-28.765 -1.989,-28.765 -2.089,-28.775 -2.185,-28.804 -2.273,-28.851 -2.35,-28.914 -3.701,-30.265 -9.799,-30.265 -10.515,-29.549 -10.515,-29.011 -10.525,-28.911 -10.554,-28.815 -10.601,-28.727 -10.664,-28.65 -11.4,-27.914 -11.477,-27.851 -11.565,-27.804 -11.661,-27.775 -11.761,-27.765 -20.015,-27.765 -20.015,-22.836 -12.781,-22.836 -12.681,-22.826 -12.585,-22.797 -12.365,-22.706 -12.276,-22.659 -12.199,-22.595 -12.03,-22.426 -11.967,-22.349 -11.926,-22.272 -11.92,-22.261 -11.828,-22.04 -11.799,-21.944 -11.789,-21.845 -11.789,-21.606 -11.799,-21.507 -11.828,-21.411 -11.92,-21.19 -11.926,-21.179 -11.967,-21.102 -12.03,-21.025 -12.199,-20.856 -12.255,-20.81 -12.276,-20.792 -12.352,-20.752 -12.365,-20.745 -12.389,-20.735 -12.389,-16.816 -12.365,-16.806 -12.276,-16.759 -12.199,-16.695 -12.03,-16.526 -11.967,-16.449 -11.926,-16.372 -11.92,-16.361 -11.828,-16.14 -11.799,-16.044 -11.789,-15.945 -11.789,-15.706 -11.799,-15.607 -11.828,-15.511 -11.92,-15.29 -11.926,-15.279 -11.964,-15.208

## Keep-outs
Keep-Out Layer:
  lines w0.05: -20.5,3.75 -11.75,3.75 -11.25,3.25 -10,2 -3.5,2 -2.75,2.75 7.5,2.75 79.5,2.75 79.5,-29.25 -2,-29.25 -3,-30.25 -3.5,-30.75 -10,-30.75 -11,-29.75 -11,-29.25 -11,-29 -11.75,-28.25 -20.5,-28.25 -20.5,3.75 ; -20.5,3.75 -19.5,3.75 -20.5,3.75

## Other copper
Component Side:
  rectangle net N6V0A: 77.025,-15.722 77.279,-15.519
  rectangle net N6V0A: 77.152,-15.875 77.305,-15.519
  rectangle net N6V0A: 69.061,-28.265 69.721,-26.589
  rectangle net P3V3: -2.491,-10.815 1.751,-9.85
  rectangle net P12V0A: 44.448,-15.082 49.807,-14.016
  rectangle net NetR31_2: 23.239,-7.691 27.862,-6.269
  rectangle net NetR35_2: 15.543,-7.767 19.26,-6.396
  rectangle net NetR20_2: 37.92,-11.831 39.927,-10.688
  rectangle net NetR23_2: 37.869,-13.279 39.901,-12.136
  rectangle net NetR43_2: 2.107,-9.037 5.815,-8.123
  rectangle net NetR41_2: 2.106,-12.414 5.714,-10.79
  rectangle net P6V0A: 73.277,-16.378 74.014,-15.292
  rectangle net P3V3: 75.919,-11.75 76.5,-11.069
  rectangle net GND: 55.497,-23.642 55.751,-22.829
  rectangle net GND: 63.292,-8.348 65.606,-7.733
  rectangle net GND: 62.293,-11.108 62.845,-8.915
  rectangle net GND: 63.231,-12.166 65.722,-11.549
  rectangle net GND: 66.046,-11.1 66.738,-8.734
  rectangle net GND: 66.046,-17.556 66.738,-15.19
  rectangle net GND: 63.231,-18.623 65.722,-18.005
  rectangle net GND: 62.293,-17.565 62.845,-15.372
  rectangle net GND: 63.292,-14.804 65.606,-14.189
  rectangle net GND: 72.046,-17.597 72.738,-15.231
  rectangle net GND: 69.231,-18.664 71.722,-18.046
  rectangle net GND: 68.293,-17.606 68.845,-15.413
  rectangle net GND: 69.292,-14.845 71.606,-14.23
  rectangle net GND: 72.046,-11.097 72.738,-8.731
  rectangle net GND: 69.231,-12.164 71.722,-11.546
  rectangle net GND: 68.293,-11.106 68.845,-8.913
  rectangle net GND: 69.292,-8.345 71.606,-7.73
  rectangle net GND: 72.046,-23.597 72.738,-21.231
  rectangle net GND: 69.231,-24.664 71.722,-24.046
  rectangle net GND: 68.293,-23.606 68.845,-21.413
  rectangle net GND: 69.292,-20.845 71.606,-20.23
  rectangle net GND: 72.046,-5.097 72.738,-2.731
  rectangle net GND: 69.231,-6.164 71.722,-5.546
  rectangle net GND: 68.293,-5.106 68.845,-2.913
  rectangle net GND: 69.292,-2.345 71.606,-1.73
  rectangle net GND: 59.547,-7.097 60.239,-4.731
  rectangle net GND: 56.732,-8.164 59.223,-7.546
  rectangle net GND: 56.328,-7.102 56.879,-4.909
  rectangle net GND: 56.792,-4.345 59.107,-3.73
  rectangle net GND: 59.546,-1.097 60.238,1.269
  rectangle net GND: 56.731,-2.164 59.222,-1.546
  rectangle net GND: 56.328,-1.102 56.879,1.091
  rectangle net GND: 56.792,1.655 59.106,2.27
  rectangle net GND: 59.547,-21.597 60.239,-19.231
  rectangle net GND: 56.732,-22.664 59.223,-22.046
  rectangle net GND: 56.268,-21.693 56.82,-19.5
  rectangle net GND: 56.792,-18.845 59.107,-18.23
  rectangle net GND: 59.547,-27.597 60.239,-25.231
  rectangle net GND: 56.732,-28.664 59.223,-28.046
  rectangle net GND: 56.268,-27.693 56.82,-25.5
  rectangle net GND: 56.792,-24.845 59.107,-24.23
Solder Side:
  rectangle net N6V0A: 69.01,-28.087 69.543,-26.498
  rectangle net P12V0A: 48.131,-14.854 50.087,-13.99
  rectangle net P6V0A: 50.747,-17.318 52.271,-16.276
  rectangle net P3V3: 0.455,-11.679 1.497,-10.104
  rectangle net P3V3: 6.704,-17.622 7.847,-15.819
  rectangle net N12V0A: 53.516,-11.196 55.853,-9.977
  rectangle net GND: 28.725,-12.568 31.621,-11.806
  rectangle net GND: 28.725,-13.863 29.818,-11.806
  region net GND: 4.583,-12.756 2.386,-12.756 2.386,-13.874 4.583,-13.874
  rectangle net GND: 3.783,-16.378 4.875,-15.26
  rectangle net GND: 6.831,-15.565 7.872,-13.609
  rectangle net GND: 7.313,-13.863 7.948,-12.949
  rectangle net GND: 13.155,-15.921 14.476,-14.529
  rectangle net N12V0A: 22.083,-17.292 25.969,-15.997
  rectangle net NetR35_2: 16.686,-7.691 17.82,-6.573
  rectangle net NetR35_2: 15.543,-7.031 19.15,-6.396
  rectangle net NetR20_2: 37.92,-11.831 39.927,-10.688
  rectangle net NetR23_2: 37.869,-13.279 39.901,-12.136
  rectangle net NetR43_2: 2.107,-9.139 7.669,-8.123
  rectangle net NetR41_2: 2.132,-12.593 5.281,-11.679
  rectangle net GND: 66.876,-26.538 67.613,-25.09
Power Plane (plane layer: these items are gaps in the copper):
  lines w0.127: 18.018,-16.759 17.002,-17.775 -1.247,-17.775 -1.856,-18.384 -1.856,-20.162 -1.424,-20.594 29.106,-20.594 32.607,-17.094 37.427,-17.094 ; 18.083,-15.743 18.083,-16.759 19.175,-17.851 27.481,-17.851 28.344,-16.987 ; 28.217,-17.114 30.675,-17.114 32.448,-15.341 43.726,-15.341 44.31,-15.926 44.513,-15.926 45.326,-16.738 46.164,-16.738 46.241,-16.815 46.291,-16.815 46.293,-16.816 49.839,-16.816 ; 33.363,-13.563 40.449,-13.563 44.107,-9.906 55.985,-9.906 56.477,-10.398 56.477,-11.76 ; 43.711,-15.341 43.711,-13.152 45.103,-11.76 75.035,-11.76 76.503,-13.228 76.503,-13.787 75.766,-14.524 ; 46.723,-26.365 72.911,-26.365 77.991,-21.285 77.991,-15.097 77.773,-14.879 76.833,-14.879 76.477,-15.235 ; 49.807,-16.81 49.807,-15.463 52.165,-13.106 71.895,-13.106 72.885,-14.097 75.339,-14.097 76.477,-15.235 ; 53.2,-24.181 71.742,-24.181 75.868,-20.055 75.868,-18.074 76.477,-17.464 76.477,-15.235
  lines w0.15: -1.207,-17.754 -9.309,-17.754 -12.205,-14.859 -12.205,-0.152 -10.097,1.956 -3.543,1.956 -2.756,2.743 79.362,2.743 79.362,-12.903 ; 18.097,-15.748 18.936,-14.91 28.334,-14.91 30.975,-14.91 31.763,-14.122 32.779,-14.122 33.363,-13.538 ; 33.363,-12.598 33.363,-13.538 ; 36.817,-17.094 43.599,-17.094 44.285,-17.78 44.285,-23.927 46.723,-26.365 ; 45.453,-16.764 46.19,-16.764 46.19,-17.602 46.672,-18.085 46.672,-23.952 46.901,-24.181 53.2,-24.181 ; 49.771,-16.789 50.635,-17.653 54.724,-17.653 55.029,-17.348 62.801,-17.348 65.418,-17.348 68.288,-14.478 71.234,-14.478 72.809,-16.053 72.809,-17.043 73.85,-18.085 75.882,-18.085 76.492,-17.475 76.492,-15.214 76.517,-15.189 ; 72.911,-26.365 73.292,-26.746 73.292,-29.007 73.368,-29.083 78.981,-29.083 79.362,-28.702 79.362,-12.776 ; 75.019,-11.735 75.019,-4.013 73.165,-2.159 -7.43,-2.159 -9.97,-4.699 -9.97,-12.751 -8.039,-14.681 -4.331,-14.681 -2.781,-13.132 -2.781,-9.017 -2.146,-8.382 3.416,-8.382 6.49,-11.455 32.245,-11.455 33.363,-12.573 33.363,-13.538

## Silkscreen, mask and mechanical layers (free items; w line width, h text height)
Top Overlay:
  drawing of 1216 lines, arcs and shapes, not listed
  text "DAC2" at 47.574,-0.254 h1.52
  text "DAC2" at -10.516,-1.651 h1.52
  text "OUT" at -10.566,-3.683 h1.52
  text "ADC1 IN" at -11.862,-6.02 h1.52
  text "ADC1" at 62.459,-6.655 h1.52
  text "REF LO" at 61.57,-17.628 h1.52 r90
  text "DAC1" at -10.185,-18.44 h1.52
  text "OUT" at -10.414,-20.625 h1.52
  text "ADC2" at 61.9,-20.879 h1.52
  text "DAC1" at 48.59,-21.031 h1.52
  text "ADC2 IN" at -9.957,-23.114 h1.52
  text "AFE_Mezzanine_template v1.0" at 6.921,-28.041 h1.5
  text "WUT" at 48.704,-28.143 h1.5
Bottom Overlay:
  drawing of 1216 lines, arcs and shapes, not listed
  text "DAC2" at -6.426,-1.448 h1.52
  text "OUT" at -6.375,-3.48 h1.52
  text "ADC1 IN" at -2.134,-6.045 h1.52
  text "P12V" at 32.271,-9.931 h1.1
  text "P3V3" at 10.35,-10.033 h1.1
  text "N6V" at 14.973,-10.033 h1.1
  text "P6V" at 19.926,-10.058 h1.1
  text "N12V" at 25.54,-10.058 h1.1
  text "DAC1" at -6.909,-18.364 h1.52
  text "OUT" at -6.68,-20.549 h1.52
  text "ADC2 IN" at -1.778,-23.063 h1.52
  text "AFE mezzanine template v1.0 WUT ISE" at 53.378,-27.864 h1.5
Mechanical 1:
  lines w0.05: -33,-7.75 -33,-10.25 -3.5,-10.25 ; -20.5,3.75 -11.75,3.75 -11.25,3.25 -10,2 -3.5,2 -2.75,2.75 7.5,2.75 79.5,2.75 79.5,-29.25 -2,-29.25 -3,-30.25 -3.5,-30.75 -10,-30.75 -11,-29.75 -11,-29.25 -11,-29 -11.75,-28.25 -20.5,-28.25 -20.5,3.75 ; -20.5,3.75 -19.5,3.75 -20.5,3.75
Mechanical 2:
  lines w0.05: -3,-27 0,-27 ; -3,0 0,0 83,0 ; 0,4 0,-27 ; 74.433,-5.967 74.7,-5.967 ; 74.46,-19.1 75.4,-19.1 ; 74.6,-4.9 75.4,-4.9 ; 74.7,-6.167 74.7,-5.967 ; 74.7,-5.768 74.7,-5.967 ; 75.1,-5.967 74.7,-5.967 ; 75.4,-19.9 75.4,-19.1 ; 75.4,-18.242 75.4,-19.1 ; 75.4,-5.667 75.4,-4.9 ; 75.4,-4.1 75.4,-4.9 ; 76.25,-12 76.75,-12 ; 77,-32 77,0 77,3 ; 77.4,-19.1 75.4,-19.1 ; 77.775,-4.9 75.4,-4.9 ; 78.032,-5.967 78.3,-5.967 ; 78.3,-6.167 78.3,-5.967 ; 78.3,-5.768 78.3,-5.967 ; 78.7,-5.967 78.3,-5.967 ; 80,-27 77,-27 0,-27
  lines w0.127: -12.33,-14.618 -11.329,-14.618
  text "DAC2 N" at 52.311,-0.965 h0.5
  text "M2.5 fi 2.7" at 2.5,-1 h0.5
  text "ADC1 IN P" at 68.466,-1.117 h0.5
  text "M2.5 fi 2.7" at 78.5,-2.5 h0.5
  text "DAC2 P" at 52.311,-5.258 h0.5
  text "1" at 78.8,-6.067 h0.5
  text "LO N" at 62.319,-7.188 h0.5
  text "ADC1 IN N" at 68.415,-13.182 h0.5
  text "LO P" at 61.938,-13.817 h0.5
  text "ADC2 IN P" at 68.423,-14 h0.5
  text "ADC2 IN N" at 68.339,-19.786 h0.5
  text "DAC1 N" at 52.464,-19.964 h0.5
  text "M2.5 fi 2.7" at 79,-25 h0.5
  text "DAC1 P" at 52.616,-25.832 h0.5
  text "M2.5 fi 2.7" at 2.5,-26 h0.5
Mechanical 8:
  lines w0.05: -1.5,-27 0,-27 ; -1.5,0 0,0 ; 0,-28 0,-27 ; 0,-26 0,-27 ; 0,-1 0,0 ; 0,1 0,0 ; 1.5,-27 0,-27 ; 1.5,0 0,0 ; 75.5,-27 77,-27 ; 75.5,0 77,0 ; 76.5,-12.25 76.5,-11.75 ; 77,-28 77,-27 ; 77,-26 77,-27 ; 77,-1 77,0 ; 77,1 77,0 ; 78.5,-27 77,-27 ; 78.5,0 77,0
  text "DAC2 N" at 47.523,-0.33 h1.1
  text "DAC2 P" at 47.549,-6.731 h1.1
  text "LO N" at 59.461,-10.592 h1.1
  text "LO P" at 59.334,-17.094 h1.1
  text "ADC2 P" at 68.047,-18.771 h1.1
  text "ADC2 N" at 67.92,-20.422 h1.1
  text "DAC1 N" at 47.828,-20.955 h1.1
  text "DAC1 P" at 47.803,-27.026 h1.1

## Text inside footprints (layer, text, board x,y; h text height)
J8: Mechanical 8 "2.5mm" at -19.55,-20.026 h1 r180; Mechanical 8 "3mm" at -24.6,-20.051 h1 r180; Drill Drawing "r0.6" at -14.086,-21.009 h1 r180; Drill Drawing "8.6" at -16.312,-17.167 h1 r180; Drill Drawing "7.1" at -14.55,-16.776 h1 r270
J11: Mechanical 8 "2.5mm" at -19.575,-3.275 h1 r180; Mechanical 8 "3mm" at -24.625,-3.3 h1 r180; Drill Drawing "r0.6" at -14.111,-4.258 h1 r180; Drill Drawing "8.6" at -16.337,-0.417 h1 r180; Drill Drawing "7.1" at -19.464,-1.781 h1 r270
J16: Mechanical 8 "Techno" at 67.8,-3 h0.6; Mechanical 8 "Pin-in-Paste" at 67.8,-2.1 h0.6
J17: Mechanical 8 "3mm" at -18.748,-9.219 h1; Mechanical 8 "2.5mm" at -14.7,-9.219 h1
J18: Mechanical 8 "Techno" at 67.8,-9 h0.6; Mechanical 8 "Pin-in-Paste" at 67.8,-8.1 h0.6
J19: Mechanical 8 "Techno" at 67.8,-15.5 h0.6; Mechanical 8 "Pin-in-Paste" at 67.8,-14.6 h0.6
J20: Mechanical 8 "3mm" at -18.748,-25.719 h1; Mechanical 8 "2.5mm" at -14.7,-25.719 h1
J21: Mechanical 8 "Techno" at 67.8,-21.5 h0.6; Mechanical 8 "Pin-in-Paste" at 67.8,-20.6 h0.6
J22: Mechanical 8 "Techno" at 61.8,-9.003 h0.6; Mechanical 8 "Pin-in-Paste" at 61.8,-8.103 h0.6
J23: Mechanical 8 "Techno" at 61.8,-15.5 h0.6; Mechanical 8 "Pin-in-Paste" at 61.8,-14.6 h0.6
SW1: Bottom Overlay "ON" at 32.51,-1.575 h1; Bottom Overlay "2" at 29.462,-6.02 h1; Bottom Overlay "1" at 31.748,-6.02 h1; Mechanical 14 "ON" at 32.51,-1.575 h1; Mechanical 14 "2" at 29.462,-6.02 h1; Mechanical 14 "1" at 31.748,-6.02 h1
SW2: Bottom Overlay "1" at 25.017,-6.167 h1; Bottom Overlay "2" at 22.731,-6.167 h1; Bottom Overlay "ON" at 25.779,-1.722 h1; Bottom Overlay "3" at 20.191,-6.167 h1; Bottom Overlay "4" at 17.651,-6.167 h1; Bottom Overlay "5" at 15.111,-6.167 h1; Bottom Overlay "6" at 12.571,-6.167 h1; Bottom Overlay "7" at 10.031,-6.167 h1; Bottom Overlay "8" at 7.491,-6.167 h1; Mechanical 14 "1" at 25.017,-6.167 h1; Mechanical 14 "2" at 22.731,-6.167 h1; Mechanical 14 "ON" at 25.779,-1.722 h1; Mechanical 14 "3" at 20.191,-6.167 h1; Mechanical 14 "4" at 17.651,-6.167 h1; Mechanical 14 "5" at 15.111,-6.167 h1; Mechanical 14 "6" at 12.571,-6.167 h1; Mechanical 14 "7" at 10.031,-6.167 h1; Mechanical 14 "8" at 7.491,-6.167 h1